# Altium PCB THIETBINHIPTIM.PcbDoc
Units mil, origin at the board's own origin, x right, y up, seen from the top; angles counter-clockwise.
Board outline 2065.03 x 1185.03 mil, 2 copper layers (Top Layer, Bottom Layer); 28 components, 23 nets, 176 pads, 25 vias.
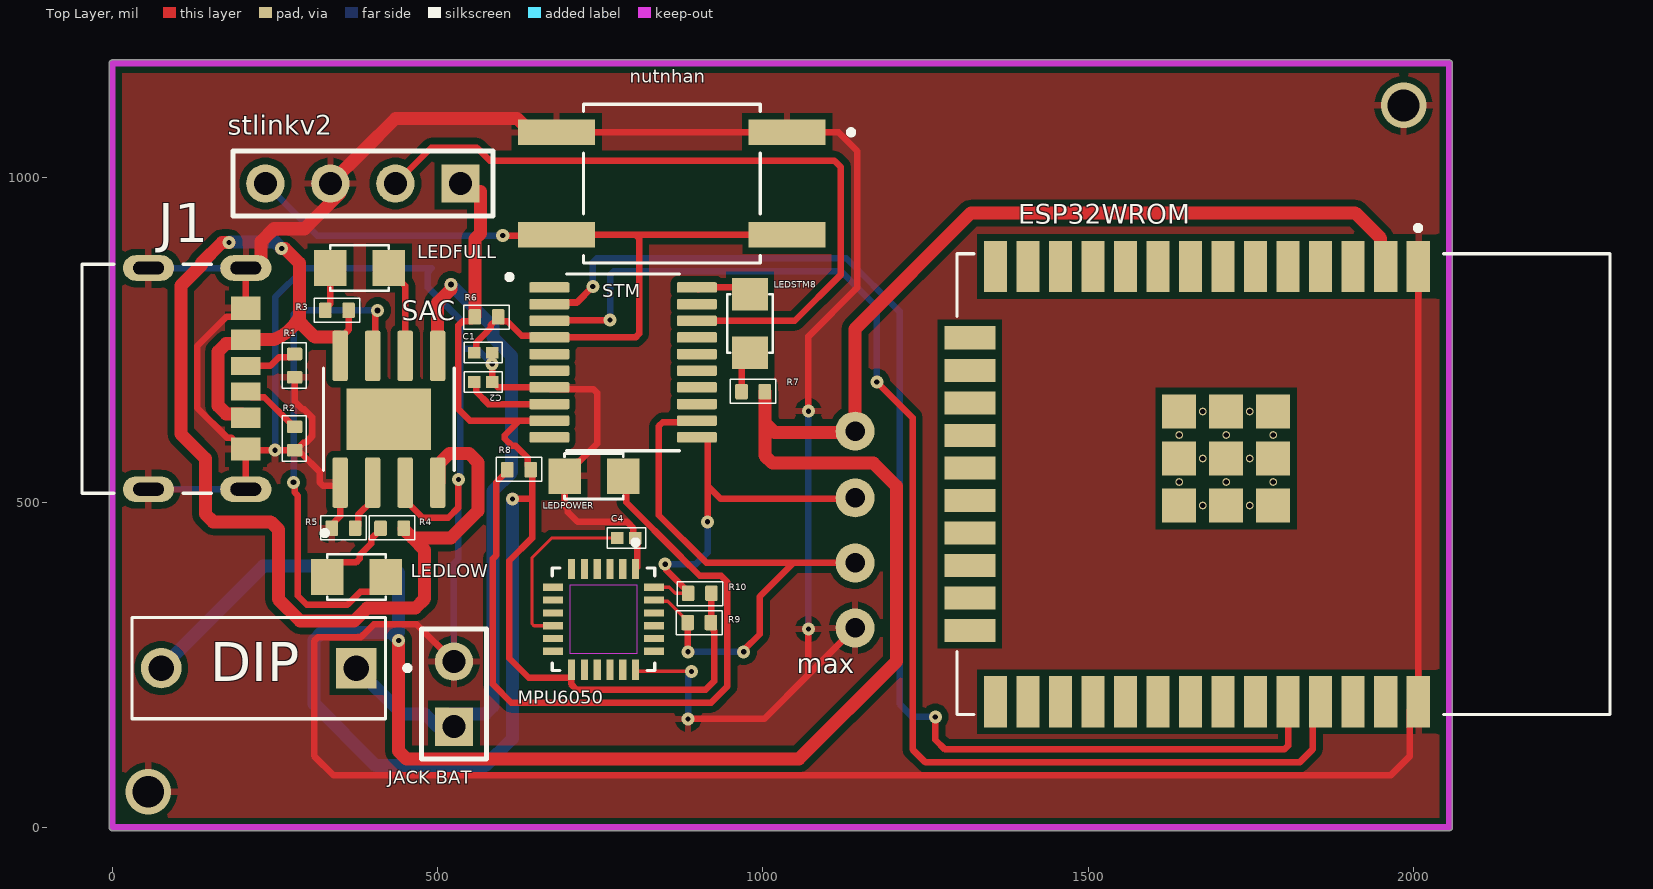
[diagram p0: Top Layer view]
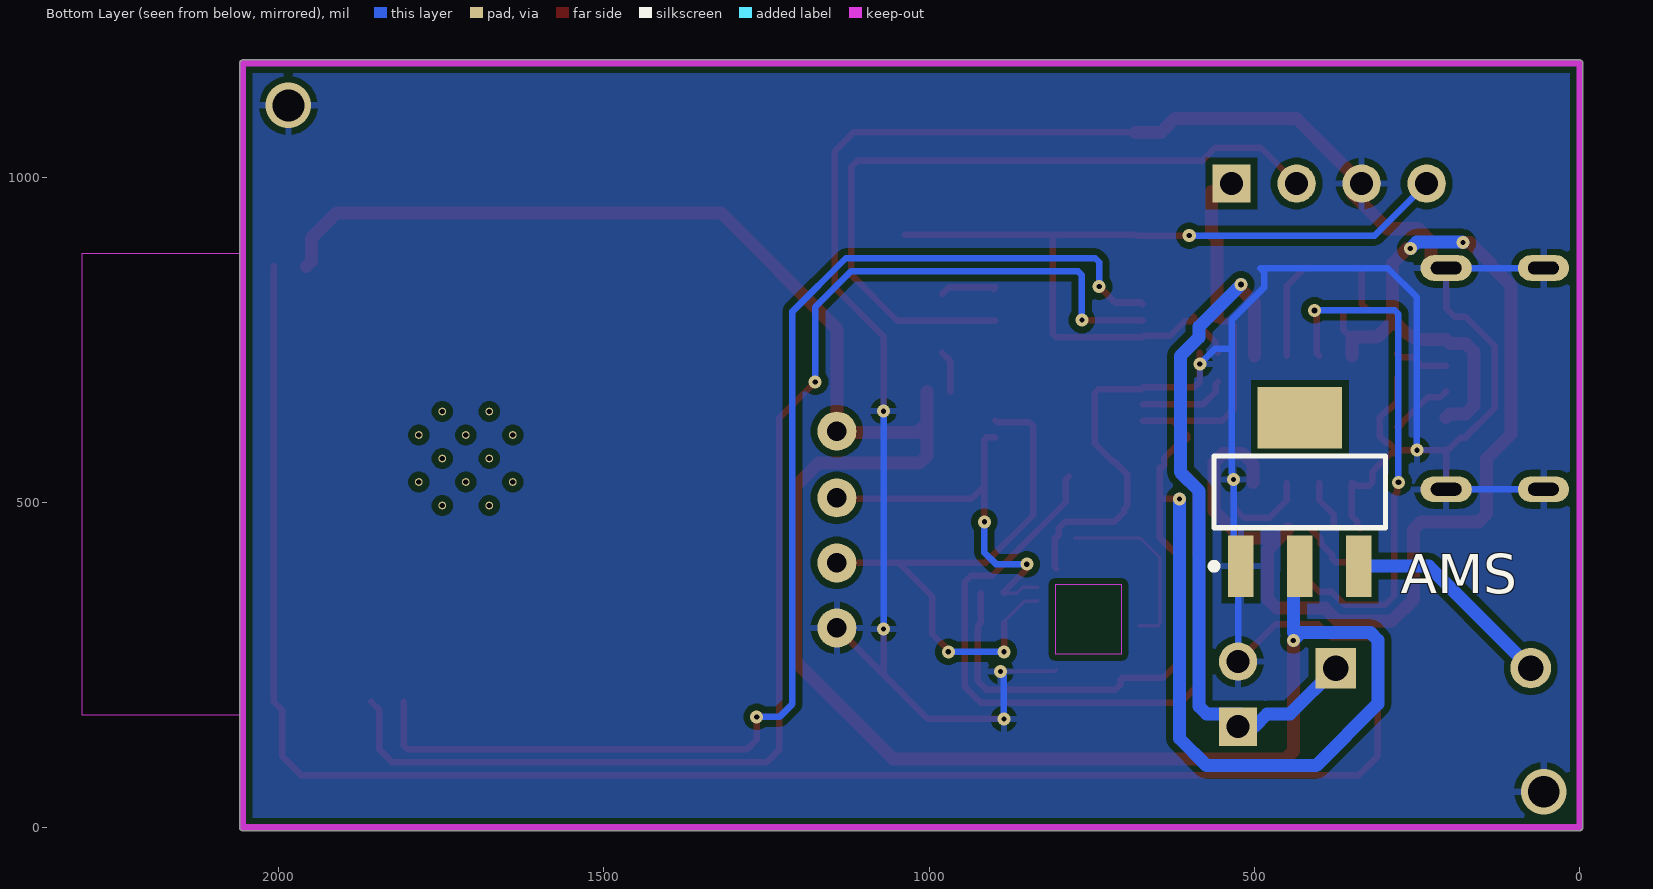
[diagram p1: Bottom Layer view, seen from below]
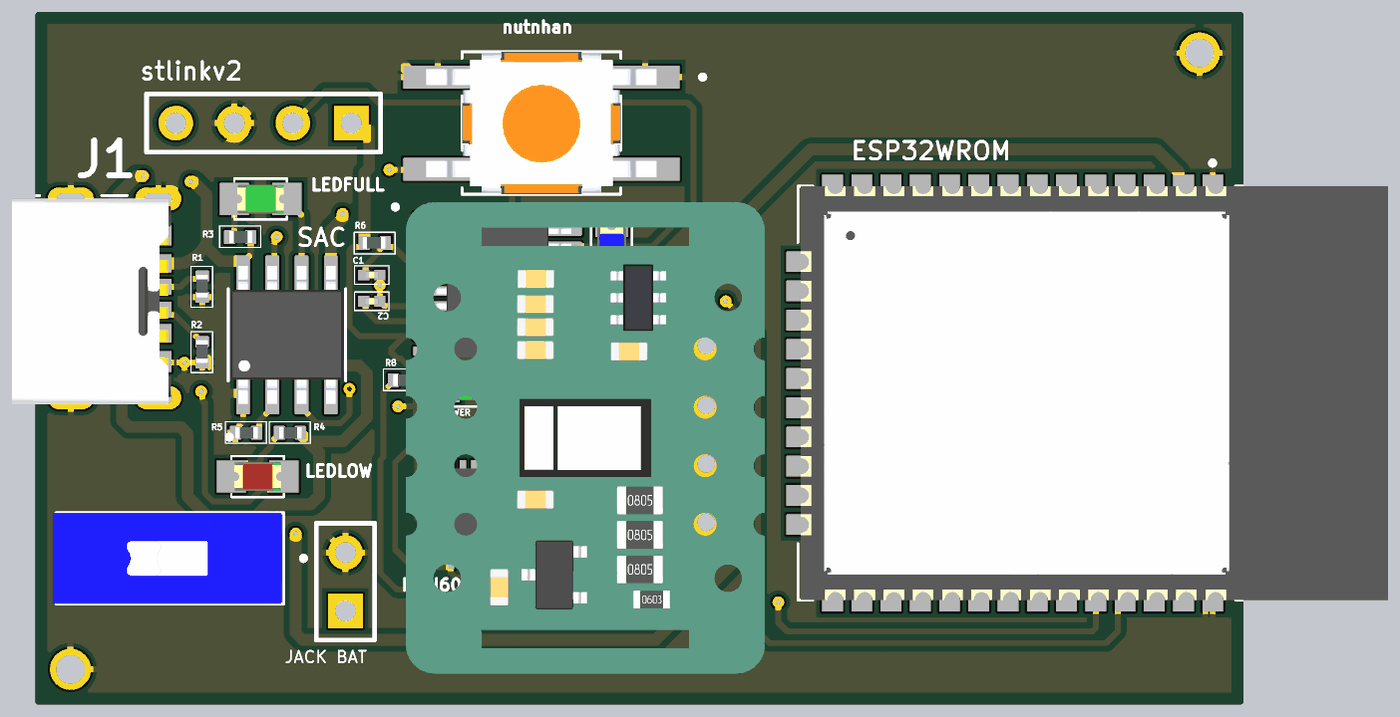
[diagram p2: 3D render of the assembled board from above, using the file's embedded part models]

## Layer stack, top to bottom
Top Solder: solder mask 0.4, Solder Resist, Dk 3.5
Top Layer: signal copper 1.4
Dielectric 1: dielectric 12.6, FR-4, Dk 4.8
Bottom Layer: signal copper 1.4
Bottom Solder: solder mask 0.4, Solder Resist, Dk 3.5

## Board outline
-5.01,0 ccw(c0,0) 0,-5.01 2055,-5.01 ccw(c2055,0) 2060.02,0 2060.02,1175 ccw(c2055,1175) 2055,1180.01 0,1180.01 ccw(c0,1175) -5.01,1175

## Design rules (kind name [scope] priority, off if disabled: settings)
Clearance [All] p1: gap=10 ignorepadtopadclearanceinfootprint=FALSE except(0: Arc-Hole Track-Hole SMDPad-Hole THPad-Hole Via-Hole Fill-Hole Poly-Hole Region-Hole Text-Hole)
PolygonConnect [All] p1: connectstyle=Relief reliefconductorwidth=10 reliefentries=4 polygonreliefangle="90 Angle" airgapwidth=10
RoutingVias [All] p1: holewidth=8 width=20 viastyle="Through Hole" minholewidth=8 minwidth=20 maxholewidth=8 maxwidth=20
SolderMaskExpansion [All] p1: expansion=4 istentingtop=FALSE
Width [All] p1: maxlimit=20 minlimit=5 preferedwidth=10 minimp=50.000000 maximp=50.000000 favimp=50.000000
30 further rules are at their usual default settings.

## Components (designator, comment, footprint, x,y, rotation, side; value= is the part's Value field where it differs from the comment)
AMS "AMS1117-3.3V" SOT223 430,515.83 r180 bottom value="AMS1117-3.3V SOT223"
C1 "100nF" "Cap 0201" 570,730 r0 top
C2 "1uF" "Cap 0201" 570,685 r180 top
C4 "0.1uF" "Cap 0201" 790,445 r0 top
DIP "DS01-254-S-01BE" SW_DS01-254-S-01BE 225,245 r90 top
ESP32WROM "ESP32 WROOM 32" ESP32-WROOM-32D 1800.43,527.87 r270 top
J1 "UJC-HP-3-SMT-TR" CUI_UJC-HP-3-SMT-TR 205,690 r270 top
"JACK BAT" "Header 2" HDR1X2 525,155 r90 top (schematic designator "jack bat")
LEDFULL "LED 0805" LED-0805-Green 425,860 r180 top
LEDLOW "LED 0805" LED-0805-Red 420,385 r180 top
LEDPOWER "LED 0805" LED-0805-Green 785,540 r180 top
LEDSTM8 "LED 0805" LED-0805-Blue 980,730 r90 top
max "Component_1" PCBComponent_1 1141.72,609.27 r0 top
MPU6050 "MPU-6050" QFN50P400X400X95-24N 755,320 r270 top
nutnhan "TL6700AF160QG" SW_TL6700AF160QG 860,990 r180 top
R1 "5.1K" "RES 0402" 280,710 r90 top
R2 "5.1K" "RES 0402" 280,597.91 r90 top
R3 "1K" "RES 0402" 345,795 r0 top
R4 "1K" "RES 0402" 430,460 r0 top
R5 "1.2K" "RES 0402" 355,460 r0 top
R6 "10k" "RES 0402" 575,785 r180 top
R7 "820" "RES 0402" 985,670 r0 top
R8 "1K" "RES 0402" 625,550 r0 top
R9 "4K7" "RES 0402" 902.09,315 r180 top
R10 "4K7" "RES 0402" 902.91,360 r180 top
SAC "TP4056" SOP127P600X175-9N 425,627.56 r90 top
stlinkv2 "Header 4" HDR1X4 535,990 r180 top
STM "STM8S003F3P6" SOP65P640X120-20N 785,715 r0 top

## Footprints (in the part's own frame and the unit in brackets; to place one, negate y for a bottom-side part, rotate by r counter-clockwise, add the part's x,y. Pads: shape width x height; smd on the part's side, far side on the other; paste and mask are expansions set on the pad)
"Cap 0201" [mm] "Chip Capacitor, 2-Leads, Body 0.65x0.35mm, IPC Medium Density"
  rect 0.48x0.46 smd: 1(-0.35,0) 2(0.35,0)
  silkscreen extent -0.75,-0.4 0.75,0.4, body extent -0.3,-0.15 0.3,0.15, height 0.32
CUI_UJC-HP-3-SMT-TR [mm]
  rect 0.7x1.15 smd: A5(-0.5,0.005) B5(0.5,0.005)
  rect 0.8x1.15 smd: A9(1.52,0.005) B9(-1.52,0.005)
  rect 0.9x1.15 smd: A12(2.75,0.005) B12(-2.75,0.005)
  oval 1x2 hole 0.5 slot 1.2 at 90 deg: S1(-4.32,0) S2(4.32,0) S3(-4.32,-3.8) S4(4.32,-3.8)
  silkscreen extent -4.47,-6.4 4.47,-1.35, body extent -4.34,-6.35 4.6,0.55, height 3.23
ESP32-WROOM-32D [mm]
  rect 2x0.9 smd: 1(-8.5,5.26) 2(-8.5,3.99) 3(-8.5,2.72) 4(-8.5,1.45) 5(-8.5,0.18) 6(-8.5,-1.09) 7(-8.5,-2.36) 8(-8.5,-3.63) 9(-8.5,-4.9) 10(-8.5,-6.17) 11(-8.5,-7.44) 12(-8.5,-8.71) 13(-8.5,-9.98) 14(-8.5,-11.25) 25(8.5,-11.25) 26(8.5,-9.98) 27(8.5,-8.71) 28(8.5,-7.44) 29(8.5,-6.17) 30(8.5,-4.9) 31(8.5,-3.63) 32(8.5,-2.36) 33(8.5,-1.09) 34(8.5,0.18) 35(8.5,1.45) 36(8.5,2.72) 37(8.5,3.99) 38(8.5,5.26)
  rect 0.9x2 smd: 15(-5.715,-12.25) 16(-4.445,-12.25) 17(-3.175,-12.25) 18(-1.905,-12.25) 19(-0.635,-12.25) 20(0.635,-12.25) 21(1.905,-12.25) 22(3.175,-12.25) 23(4.445,-12.25) 24(5.715,-12.25)
  rect 1.33x1.33 smd: 39(-2.835,-0.405) 39(-2.835,-2.24) 39(-2.835,-4.075) 39(-1,-0.405) 39(-1,-2.24) 39(-1,-4.075) 39(0.835,-0.405) 39(0.835,-2.24) 39(0.835,-4.075)
  round 0.3 hole 0.2: 39(-2.835,-1.322) 39(-2.835,-3.157) 39(-1.917,-0.405) 39(-1.917,-2.24) 39(-1.917,-4.075) 39(-1,-1.322) 39(-1,-3.157) 39(-0.082,-0.405) 39(-0.082,-2.24) 39(-0.082,-4.075) 39(0.835,-1.322) 39(0.835,-3.157)
  Keep-Out Layer region: 9,6.45 -9,6.45 -9,12.75 9,12.75
  Keep-Out Layer region: 9,6.45 -9,6.45 -9,12.75 9,12.75
  silkscreen extent -10.1,-12.75 9,12.75, body extent -9,-12.62 9,12.88, height 3.2
HDR1X2 [mm] "Connector; Header; 2 Position"
  rect 1.5x1.5 hole 0.9: 1(0,0)
  round 1.5 hole 0.9: 2(2.54,0)
  silkscreen extent -1.27,-1.27 3.81,1.27
HDR1X4 [mm] "Connector; Header; 4 Position"
  rect 1.5x1.5 hole 0.9: 1(0,0)
  round 1.5 hole 0.9: 2(2.54,0) 3(5.08,0) 4(7.62,0)
  silkscreen extent -1.27,-1.27 8.89,1.27
LED-0805-Blue [mil]
  rect 50x55 smd: 1(0,0) 2(90,0)
  silkscreen extent 0,-35 90,35, body extent 5,-25 85,25, height 43
LED-0805-Green [mil]
  rect 50x55 smd: 1(0,0) 2(90,0)
  silkscreen extent 0,-35 90,35, body extent 5,-25 85,25, height 43
LED-0805-Red [mil]
  rect 50x55 smd: 1(0,0) 2(90,0)
  silkscreen extent 0,-35 90,35, body extent 5,-25 85,25, height 43
PCBComponent_1 [mil]
  round 60 hole 30: 1(0,0) 2(0,-102.55) 3(0,-202.55) 4(0,-302.55)
  body extent -514,-562 101,245, height 217
QFN50P400X400X95-24N [mm]
  rect 0.79x0.28 smd: 1(-1.97,1.25) 2(-1.97,0.75) 3(-1.97,0.25) 4(-1.97,-0.25) 5(-1.97,-0.75) 6(-1.97,-1.25) 13(1.97,-1.25) 14(1.97,-0.75) 15(1.97,-0.25) 16(1.97,0.25) 17(1.97,0.75) 18(1.97,1.25)
  rect 0.28x0.79 smd: 7(-1.25,-1.97) 8(-0.75,-1.97) 9(-0.25,-1.97) 10(0.25,-1.97) 11(0.75,-1.97) 12(1.25,-1.97) 19(1.25,1.97) 20(0.75,1.97) 21(0.25,1.97) 22(-0.25,1.97) 23(-0.75,1.97) 24(-1.25,1.97)
  Keep-Out Layer region: 1.35,-1.3 -1.35,-1.3 -1.35,1.3 1.35,1.3
  silkscreen extent -3.1,-2 2,2, body extent -2,-2 2,2, height 0.93
"RES 0402" [mm]
  rrect20% 0.49x0.6 smd: 1(-0.455,0) 2(0.455,0)
  silkscreen extent -0.89,-0.46 0.89,0.48, body extent -0.47,-0.25 0.53,0.25, height 0.32
SOP65P640X120-20N [mm]
  rrect25% 1.56x0.41 smd: 1(-2.88,2.925) 2(-2.88,2.275) 3(-2.88,1.625) 4(-2.88,0.975) 5(-2.88,0.325) 6(-2.88,-0.325) 7(-2.88,-0.975) 8(-2.88,-1.625) 9(-2.88,-2.275) 10(-2.88,-2.925) 11(2.88,-2.925) 12(2.88,-2.275) 13(2.88,-1.625) 14(2.88,-0.975) 15(2.88,-0.325) 16(2.88,0.325) 17(2.88,0.975) 18(2.88,1.625) 19(2.88,2.275) 20(2.88,2.925)
  silkscreen extent -4.54,-3.45 2.2,3.45, body extent -3.2,-3.25 3.2,3.25, height 1.23
SOP127P600X175-9N [mm]
  rrect25% 1.97x0.6 smd: 1(-2.475,1.905) 2(-2.475,0.635) 3(-2.475,-0.635) 4(-2.475,-1.905) 5(2.475,-1.905) 6(2.475,-0.635) 7(2.475,0.635) 8(2.475,1.905)
  rect 2.413x3.302 smd paste-3: 9(0,0)
  silkscreen extent -4.54,-2.55 2,2.6, body extent -3,-2.45 3,2.45, height 1.75
SOT223 [mm]
  rect 1x2.4 smd: 1(-2.3,-2.9) 2(0,-2.9) 3(2.3,-2.9)
  rect 3.3x2.4 smd: 4(0,2.9)
  silkscreen extent -3.48,-3.02 3.35,1.4, body extent -3.25,-3.56 3.25,3.4, height 1.68
SW_DS01-254-S-01BE [mm]
  rect 1.58x1.58 / inner round 1.58 / far side rect 1.58x1.58 hole 1: 1A(0,-3.81)
  round 1.58 hole 1: 1B(0,3.81)
  silkscreen extent -1.98,-5.9 1.98,4.95, body extent -1.98,-4.83 1.98,5.07, height 5.18
SW_TL6700AF160QG [mm]
  rect 3x1 smd: 1(-4.5,-2) 2(4.5,-2) 3(-4.5,2) 4(4.5,2)
  silkscreen extent -7.1,-3.1 3.45,3.1, body extent -5,-3.1 5,3.1, height 3.5

## Part data
AMS: library part "AMS1117 SMD", "Dán", Chung_Loai=Dán, Don_Vi=Con, Ma_Hang=MH000596
C1 C2 C4: library part "Cap 0201", "Capacitor SMD 0201"
DIP: "1 Position, Through Hole, 2.54 mm Pitch, Raised Slide Actuator, Flat Bottom, Short Pin, DIP Switch", Package=None, Check_prices=https://www.snapeda.com/parts/DS01-254-S-01BE/Same+Sky/view-part/?ref=eda, MF="Same Sky", MP=DS01-254-S-01BE, SnapEDA_Link=https://www.snapeda.com/parts/DS01-254-S-01BE/Same+Sky/view-part/?ref=snap
J1 nutnhan: Package=None, Availability=Unavailable, Price=None
  J1: MP=UJC-HP-3-SMT-TR
  nutnhan: MP=TL6700AF160QG
"JACK BAT": "Header, 2-Pin", LatestRevisionDate=17-Jul-2002, LatestRevisionNote="Re-released for DXP Platform.", Publisher="Altium Limited"
LEDFULL LEDPOWER: library part "LED 0805 Xanh La", "Dán", Chung_Loai=Dán, Don_Vi=Con, Ma_Hang=MH002326, Ten_Linh_Kien="LED 0805 Màu Xanh Lá (Green)"
LEDLOW: library part "LED 0805 Do", "Dán", Chung_Loai=Dán, Don_Vi=Con, Ma_Hang=MH000897, Ten_Linh_Kien="LED 0805 Màu Đỏ (Red)"
LEDSTM8: library part "LED 0805 Xanh Duong", "Dán", Chung_Loai=Dán, Don_Vi=Con, Ma_Hang=MH002327, Ten_Linh_Kien="LED 0805 Màu Xanh Dương (Blue)"
MPU6050: "MPU-6050 series Accelerometer, Gyroscope, 3 Axis Sensor Evaluation Board", Package="QFN-24 InvenSense", Check_prices=https://www.snapeda.com/parts/MPU-6050/TDK+InvenSense/view-part/?ref=eda, MF="TDK InvenSense", MP=MPU-6050, SnapEDA_Link=https://www.snapeda.com/parts/MPU-6050/TDK+InvenSense/view-part/?ref=snap
R1 R2 R3 R4 R5 R7 R8 R9 R10: library part "RES 0402", "RES SMD 0402", Manufacturer="Vishay Dale", Manufacturer Part Number=CRCW040210K0FKED, Operating Temperature="-55°C ~ 155°C", Package / Case="0402 (1005 Metric)", Power (Watts)="0.063W, 1/16W", Resistance (Ohms)=10k, Supplier Part Number 1=541-10.0KLCT-ND, Temperature Coefficient=±100ppm/°C, Tolerance=±1%, Category=Resistors, ComponentLink1Description=http://www.vishay.com/docs/20035/dcrcwe3.pdf, ComponentLink1URL=http://www.vishay.com/docs/20035/dcrcwe3.pdf, Composition="Thick Film", Features="Automotive AEC-Q200", Height="0.016\" (0.40mm)", Number of Terminations=2, Packaging="Cut Tape (CT)", Pricing 1="10=0.083, 50=0.0444, 200=0.0255, 1000=0.0174 (USD)", RoHS="RoHS Compliant", Size / Dimension="0.039\" L x 0.020\" W (1.00mm x 0.50mm)", Stock 1=2392462, Supplier 1=Digi-Key, Supplier Device Package="0402 (1005 Metric)"
R6: library part "RES 0402", "RES SMD 0402", Manufacturer="Vishay Dale", Manufacturer Part Number=CRCW040210K0FKED, Operating Temperature="-55°C ~ 155°C", Package / Case="0402 (1005 Metric)", Power (Watts)="0.063W, 1/16W", Supplier Part Number 1=541-10.0KLCT-ND, Temperature Coefficient=±100ppm/°C, Tolerance=±1%, Category=Resistors, ComponentLink1Description=http://www.vishay.com/docs/20035/dcrcwe3.pdf, ComponentLink1URL=http://www.vishay.com/docs/20035/dcrcwe3.pdf, Composition="Thick Film", Features="Automotive AEC-Q200", Height="0.016\" (0.40mm)", Number of Terminations=2, Packaging="Cut Tape (CT)", Pricing 1="10=0.083, 50=0.0444, 200=0.0255, 1000=0.0174 (USD)", Resistance (Ohms)=10k, RoHS="RoHS Compliant", Size / Dimension="0.039\" L x 0.020\" W (1.00mm x 0.50mm)", Stock 1=2392462, Supplier 1=Digi-Key, Supplier Device Package="0402 (1005 Metric)"
SAC: "Complete single cell Li-Ion battery with a constant current / constant voltage linear charger", Package=Package, Availability="Not in stock", Check_prices=https://www.snapeda.com/parts/TP4056/NanJing+Top+Power+ASIC+Corp./view-part/?ref=eda, MF="NanJing Top Power ASIC Corp.", MP=TP4056, Price=None, SnapEDA_Link=https://www.snapeda.com/parts/TP4056/NanJing+Top+Power+ASIC+Corp./view-part/?ref=snap
stlinkv2: "Header, 4-Pin", LatestRevisionDate=17-Jul-2002, LatestRevisionNote="Re-released for DXP Platform.", Publisher="Altium Limited"
STM: "STM8 series Microcontroller IC 8-Bit 16MHz 8KB (8K x 8) FLASH 20-TSSOP", Package="TSSOP-20 STMicroelectronics", Check_prices=https://www.snapeda.com/parts/STM8S003F3P6/STMicroelectronics/view-part/?ref=eda, MF=STMicroelectronics, MP=STM8S003F3P6, SnapEDA_Link=https://www.snapeda.com/parts/STM8S003F3P6/STMicroelectronics/view-part/?ref=snap

## Via types
v1: diameter 20, hole 8, Top Layer to Bottom Layer, 20 vias
v2: diameter 20, hole 9, Top Layer to Bottom Layer, 3 vias
v3: diameter 70, hole 49, Top Layer to Bottom Layer, 2 vias

## Nets (pads, with @x,y where several pads share a name; then routed paths per layer and width w, separated by ;. In a path a pad name is that pad's centre, name@x,y a point inside that pad or via, vN(x,y) a via of type N, cw(c..) or ccw(c..) an arc to the next point about the centre after c; other vN are vias at no path point)
NetAMS_1: "JACK BAT.2" AMS.1 C1.2 C2.1 C4.2 ESP32WROM.1 ESP32WROM.38 J1.A12 J1.B12 J1.S1 J1.S2 J1.S3 J1.S4 LEDPOWER.2 max.4 MPU6050.1 MPU6050.18 nutnhan.1 nutnhan.2 R1.1 R2.1 R5.1 SAC.1 SAC.3 stlinkv2.3 STM.7 | length 8344.6
  Top Layer w5: MPU6050.18 806.65,240 v1(890,240)
  Top Layer w10: J1.S2 205,581.54 J1.A12 ; J1.S1 205,798.46 J1.B12 192.48,785.55 175.55,785.55 130,740 130,645.45 176.05,599.41 182.6,599.41 200.28,581.73 J1.A12 ; R2.1 v1(250,580) 206.93,580 J1.A12 ; R1.1 280,655 292.22,642.78 294.59,642.78 306.81,630.56 306.81,601.1 296.89,591.18 293.35,591.18 R2.1@282.17,580 ; R2.1@284.65,575.35 290.18,575.35 318.3,547.23 318.3,530.86 324.16,525 343.19,525 348.31,530.12 SAC.1 350,478.63 341.73,470.36 341.73,464.65 R5.1 ; SAC.3 450,503.15 469.96,483.19 476.81,476.34 516.29,476.34 531.81,491.86 v1(531.81,535) ; 525,255 467.5,312.5 401.92,312.5 381.92,292.5 315.86,292.5 310,286.64 310,110 340,80 1965,80 1994.8,109.8 1994.8,180.51 ESP32WROM.38 ESP32WROM.1 ; C1.2 C2.1 584.17,685 592.56,676.61 STM.7 674.13,674.09 739.14,674.09 745,668.24 745,590 717.5,562.5 715,562.5 695,542.5 695,495 700,490 700,485 715,470 790.94,470 800.67,460.27 800.67,449.06 804.72,445 806.72,445 806.72,400.06 MPU6050.1 ; nutnhan.2 nutnhan.1 1076.54,1068.74 1116.26,1068.74 1145,1040 1145,830 1070,755 v1(1070,640) ; v1(885,166.89) 1001.89,166.89 1070,235 ; v1(1070,305) 1070,235 ; max.4@1140,305 1070,235
  Top Layer w20: J1.S1 219.44,860.08 228.39,869.03 228.39,900.74 248.12,920.47 295.12,920.47 stlinkv2.3@349.82,975.18 ; stlinkv2.3 384.53,1039.53 435,1090 622.2,1090 643.46,1068.74 nutnhan.2
  Bottom Layer w10: J1.S4 J1.S2 ; J1.S3 J1.S1 ; v1(250,580) 250,815 294.82,859.82 490.68,859.82 485,854.14 485,830 535,780 535,736.28 ; AMS.1@520,401.1 531.81,412.91 v1@531.81,530.38 ; AMS.1 525,397.2 525,255 ; v1(531.81,535) 533.72,536.91 533.72,543.98 535,545.26 535,736.28 ; v1(583.78,712.46) 559.96,736.28 535,736.28 ; v1(885,166.89) 885,232.29 890,237.29 v1(890,240) ; v1(1070,305) v1(1070,640)
  other v3: 55,55 1985,1110
NetAMS_2: AMS.2 ESP32WROM.2 max.1 MPU6050.13 R6.2 R7.2 R8.2 R9.1 R10.1 stlinkv2.1 STM.9 | length 5341.7
  Top Layer w10: R6.2@557.44,785.35 557.44,783.19 552.44,778.19 538.19,778.19 531.77,771.77 531.77,643.23 549.57,625.43 625.43,625.43 ; v1(615,505) 645,505 ; STM.9 625.43,625.43 ; R10.1 920.41,359.59 920.41,315.41 R9.1 924.65,310.35 924.65,302.69 925,302.33 925,225 911.89,211.89 713.75,211.89 704.96,220.68 704.96,227.82 702.78,230 640,230 610,260 610,410 645,445 645,505 ; 625.43,625.43 603.1,603.1 603.1,597.73 613.7,587.13 619.41,587.13 624.73,581.81 638.27,568.27 638.27,556.81 640.91,554.17 645,554.17 645,505
  Top Layer w20: v1(440,287.5) 440,117.19 451.72,105.47 1055.47,105.47 1205,255 1205,525 1170,560 1014.63,560 1002.91,571.72 1002.91,622.09 ; R6.2@557.44,785.35 557.44,904.87 565.47,912.9 565.47,977.81 ; R7.2 1002.91,622.09 ; ESP32WROM.2 1949.8,870.24 1949.8,905.61 1910.41,945 1320,945 1141.72,766.72 max.1 1140,607.55 1017.45,607.55 1002.91,622.09
  Bottom Layer w20: AMS.2 439.69,391.97 439.69,353.01 440,352.69 440,300 ; v1(440,287.5) 427.5,300 321.72,300 310,288.28 310,190 405,95 573.28,95 615,136.72 v1(615,505)
NetAMS_3: AMS.3 DIP.1B | length 329.3
  Bottom Layer w20: DIP.1B 231.65,401.65 AMS.3
NetC1_1: C1.1 nutnhan.3 nutnhan.4 R6.1 stlinkv2.4 STM.4 | length 1292.7
  Top Layer w10: C1.1 559.33,733.11 559.33,745.7 571.82,758.19 581.73,768.11 581.73,772.33 587.59,778.19 588.27,778.19 R6.1@592.91,782.83 ; R6.1 R6.1@592.91,782.83 ; v1(600,910) 681.57,910 nutnhan.4 803.74,911.26 ; nutnhan.3 803.74,911.26 ; R6.1@592.91,782.83 597.56,778.19 606.81,778.19 629.09,755.91 669.09,755.91 STM.4 804.14,753.39 810,759.24 810,905 803.74,911.26
  Bottom Layer w10: stlinkv2.4 315,910 v1(600,910)
NetC2_2: C2.2 STM.8 | length 136.6
  Top Layer w10: C2.2 559.33,681.89 559.33,669.73 578.04,651.02 STM.8
NetC4_1: C4.1 MPU6050.10 | length 279.2
  Top Layer w5: MPU6050.10 647.93,310.16 645,313.09 645,415 675,445 C4.1
NetDIP_1A: "JACK BAT.1" DIP.1A SAC.5 | length 1077.7
  Top Layer w20: SAC.5 500,806.88 520.18,827.06 v2(520.18,834.82)
  Bottom Layer w20: DIP.1A 445.47,174.53 480.47,174.53 500,155 519.53,174.53 573.28,174.53 585,186.24 585,517.43 613.78,546.21 613.78,724.89 585,753.66 585,770 v2(520.18,834.82)
NetESP32WROM_34: ESP32WROM.34 STM.2 | length 1943.5
  Top Layer w10: STM.2 674.13,807.09 714.03,807.09 v1(738.47,831.53) ; v1(1265,170) 1265,135 1280,120 1801.66,120 1807.52,125.86 ESP32WROM.34
  Bottom Layer w10: v1(738.47,831.53) 738.47,869.14 744.33,875 1128.28,875 1210,793.28 1210,190 1230,170 v1(1265,170)
NetESP32WROM_35: ESP32WROM.35 STM.3 | length 2010.9
  Top Layer w10: STM.3 672.13,779.49 764.49,779.49 v1(765,780) ; v1(1175,685) 1230,630 1230,120 1250,100 1825,100 1845,120 1845,180.71 ESP32WROM.35
  Bottom Layer w10: v1(765,780) 765,849.14 770.86,855 1120,855 1175,800 v1(1175,685)
NetJ1_A5: J1.A5 R1.2 | length 82.4
  Top Layer w10: J1.A5 242.83,709.68 256.42,723.27 275.35,723.27 R1.2
NetJ1_A9: J1.A9 J1.B9 R3.2 R4.2 SAC.4 SAC.8 | length 1990
  Top Layer w10: SAC.8@350,751.97 362.91,764.88 R3.2
  Top Layer w20: v1(179.31,899.31) 168.42,899.31 136.71,867.6 136.71,864.58 105,832.87 105,605 142.95,567.05 142.95,481.72 154.67,470 243.28,470 255,458.28 255,350.93 288.43,317.5 371.57,317.5 391.57,337.5 465.78,337.5 480,351.72 480,426.46 461.46,445 ; J1.B9@199.09,744.09 174.9,744.09 162.56,731.75 162.56,648.25 174.9,635.91 199.45,635.91 J1.A9 ; J1.B9 243.12,749.84 ccw(c243.06,769.84) 250.3,751.2 ccw(c224.6,816.9) 287.56,785.07 ; v1(260.08,890) 265,890 287.56,867.44 287.56,781.22 ; 291.95,773.05 311.22,753.78 348.19,753.78 350,751.97 SAC.8 ; R4.2 447.91,458.54 461.46,445 ; SAC.4@501.81,530.12 501.81,558.9 517.91,575 548.28,575 561.81,561.47 561.81,486.5 520.31,445 461.46,445
  Bottom Layer w20: v1(179.31,899.31) 179.76,899.76 250.31,899.76 v1(260.08,890)
NetJ1_B5: J1.B5 R2.2 | length 98.1
  Top Layer w10: J1.B5 213.98,661.54 233.42,661.54 273.19,621.76 273.19,620.47 277.83,615.83 R2.2
NetLEDFULL_1: LEDFULL.1 SAC.6 | length 145.4
  Top Layer w10: LEDFULL.1 425,857.5 450,832.5 SAC.6
NetLEDFULL_2: LEDFULL.2 R3.1 | length 68.3
  Top Layer w10: R3.1 327.09,797.17 335,805.08 LEDFULL.2
NetLEDLOW_1: LEDLOW.1 SAC.7 | length 800.2
  Top Layer w10: v2(278.3,530.66) 280.22,528.75 280.22,515.14 285,510.36 285,356.29 298.79,342.5 361.21,342.5 381.21,362.5 400,362.5 420,382.5 LEDLOW.1 ; SAC.7 403.78,728.78 403.78,791.22 v2(407.56,795)
  Bottom Layer w10: v2(278.3,530.66) 278.3,789.14 284.16,795 v2(407.56,795)
NetLEDLOW_2: LEDLOW.2 R4.1 | length 123.2
  Top Layer w10: LEDLOW.2 330,387.5 350,407.5 374.31,407.5 380,413.19 380,418.71 397.56,436.27 397.56,443.31 412.09,457.83 R4.1
NetLEDPOWER_1: LEDPOWER.1 R8.1 | length 1136.4
  Top Layer w10: R8.1@610,555 610,550.75 590,530.75 590,418.28 585,413.28 585,220 613.11,191.89 920.17,191.89 945.47,217.19 945.47,376.89 935.56,386.81 902.83,386.81 875,414.64 875,415 790,500 790,535 LEDPOWER.1
NetLEDSTM8_1: LEDSTM8.1 R7.1 | length 65.3
  Top Layer w10: R7.1 967.09,717.09 LEDSTM8.1
NetLEDSTM8_2: LEDSTM8.2 STM.20 | length 89.4
  Top Layer w10: STM.20@900.91,827.64 STM.20 969.84,830.16 LEDSTM8.2
Netmax_2: max.2 MPU6050.24 R10.2 STM.11 | length 644.9
  Top Layer w5: MPU6050.24 856.29,369.21 865.5,360 R10.2
  Top Layer w10: v1(849.82,404.82) 851.74,402.91 851.74,395.43 885,362.17 R10.2 ; v1(915,470) 915,525 ; max.2@1140,505 935,505 915,525 ; STM.11@911.93,599.84 STM.11 STM.11@911.93,599.84 ; STM.11@911.93,599.84 STM.11@915,596.77 ; STM.11@911.93,599.84 STM.11@915,596.77 ; 915,525 915,583.23 ; 915,583.23 STM.11@915,596.77 ; 915,583.23 STM.11@915,596.77
  Bottom Layer w10: v1(849.82,404.82) 850,405 897.29,405 915,422.71 v1(915,470)
Netmax_3: max.3 MPU6050.23 R9.2 STM.12 | length 898
  Top Layer w5: MPU6050.23 834.23,347.85 853.48,347.85 884.17,317.17 R9.2
  Top Layer w10: R9.2 884.59,314.59 884.59,270.41 v1(885,270) ; STM.12 895.87,622.91 845.86,622.91 840,617.06 840,480 912.74,407.26 1047.26,407.26 ; v1(970.47,270) 970.47,272.71 995,297.23 995,355 1047.26,407.26 ; max.3 1141.17,407.26 1047.26,407.26
  Bottom Layer w10: v1(885,270) v1(970.47,270)
NetR5_2: R5.2 SAC.2 | length 81.3
  Top Layer w10: R5.2 377.56,464.65 377.56,480.71 400,503.15 SAC.2
Netstlinkv2_2: stlinkv2.2 STM.18 | length 1136.3
  Top Layer w10: stlinkv2.2 470.04,1025 490.04,1045 560.27,1045 580.27,1025 1110,1025 1120,1015 1120,850 1048.98,778.98 STM.18
pads on no net: AMS.4 ESP32WROM.3 ESP32WROM.4 ESP32WROM.5 ESP32WROM.6 ESP32WROM.7 ESP32WROM.8 ESP32WROM.9 ESP32WROM.10 ESP32WROM.11 ESP32WROM.12 ESP32WROM.13 ESP32WROM.14 ESP32WROM.15 ESP32WROM.16 ESP32WROM.17 ESP32WROM.18 ESP32WROM.19 ESP32WROM.20 ESP32WROM.21 ESP32WROM.22 ESP32WROM.23 ESP32WROM.24 ESP32WROM.25 ESP32WROM.26 ESP32WROM.27 ESP32WROM.28 ESP32WROM.29 ESP32WROM.30 ESP32WROM.31 ESP32WROM.32 ESP32WROM.33 ESP32WROM.36 ESP32WROM.37 ESP32WROM.39 MPU6050.2 MPU6050.3 MPU6050.4 MPU6050.5 MPU6050.6 MPU6050.7 MPU6050.8 MPU6050.9 MPU6050.11 MPU6050.12 MPU6050.14 MPU6050.15 MPU6050.16 MPU6050.17 MPU6050.19 MPU6050.20 MPU6050.21 MPU6050.22 SAC.9 STM.1 STM.5 STM.6 STM.10 STM.13 STM.14 STM.15 STM.16 STM.17 STM.19

## Polygon pours and split planes (outlines as drawn)
NetAMS_1 on Top Layer "NETAMS_1_L01_P001" (solid, remove dead copper, pour order 1): 0,0 2055,0 2055,1175 0,1175
NetAMS_1 on Bottom Layer "NETAMS_1_L02_P000" (solid, remove dead copper, pour order 0): 0,0 2055,0 2055,1175 0,1175

## Keep-outs
Keep-Out Layer:
  lines w10: 0,980 0,965 ; 0,965 0,0 2055,0 2055,1175 2020,1175 1960,1175 1835,1175 0,1175 0,965

## Text inside footprints (layer, text, board x,y; h text height)
ESP32WROM: Mechanical 13 "ANTENNA" at 2154.76,764.09 h70 r270